# Altium PCB ethernet_version2.PcbDoc
Units mm, origin at the board's own origin, x right, y up, seen from the top; angles counter-clockwise.
Board outline 85 x 56.1 mm, 2 copper layers (Top Layer, Bottom Layer), stack 1.67 mm thick; 36 components, 56 nets, 241 pads, 200 vias.
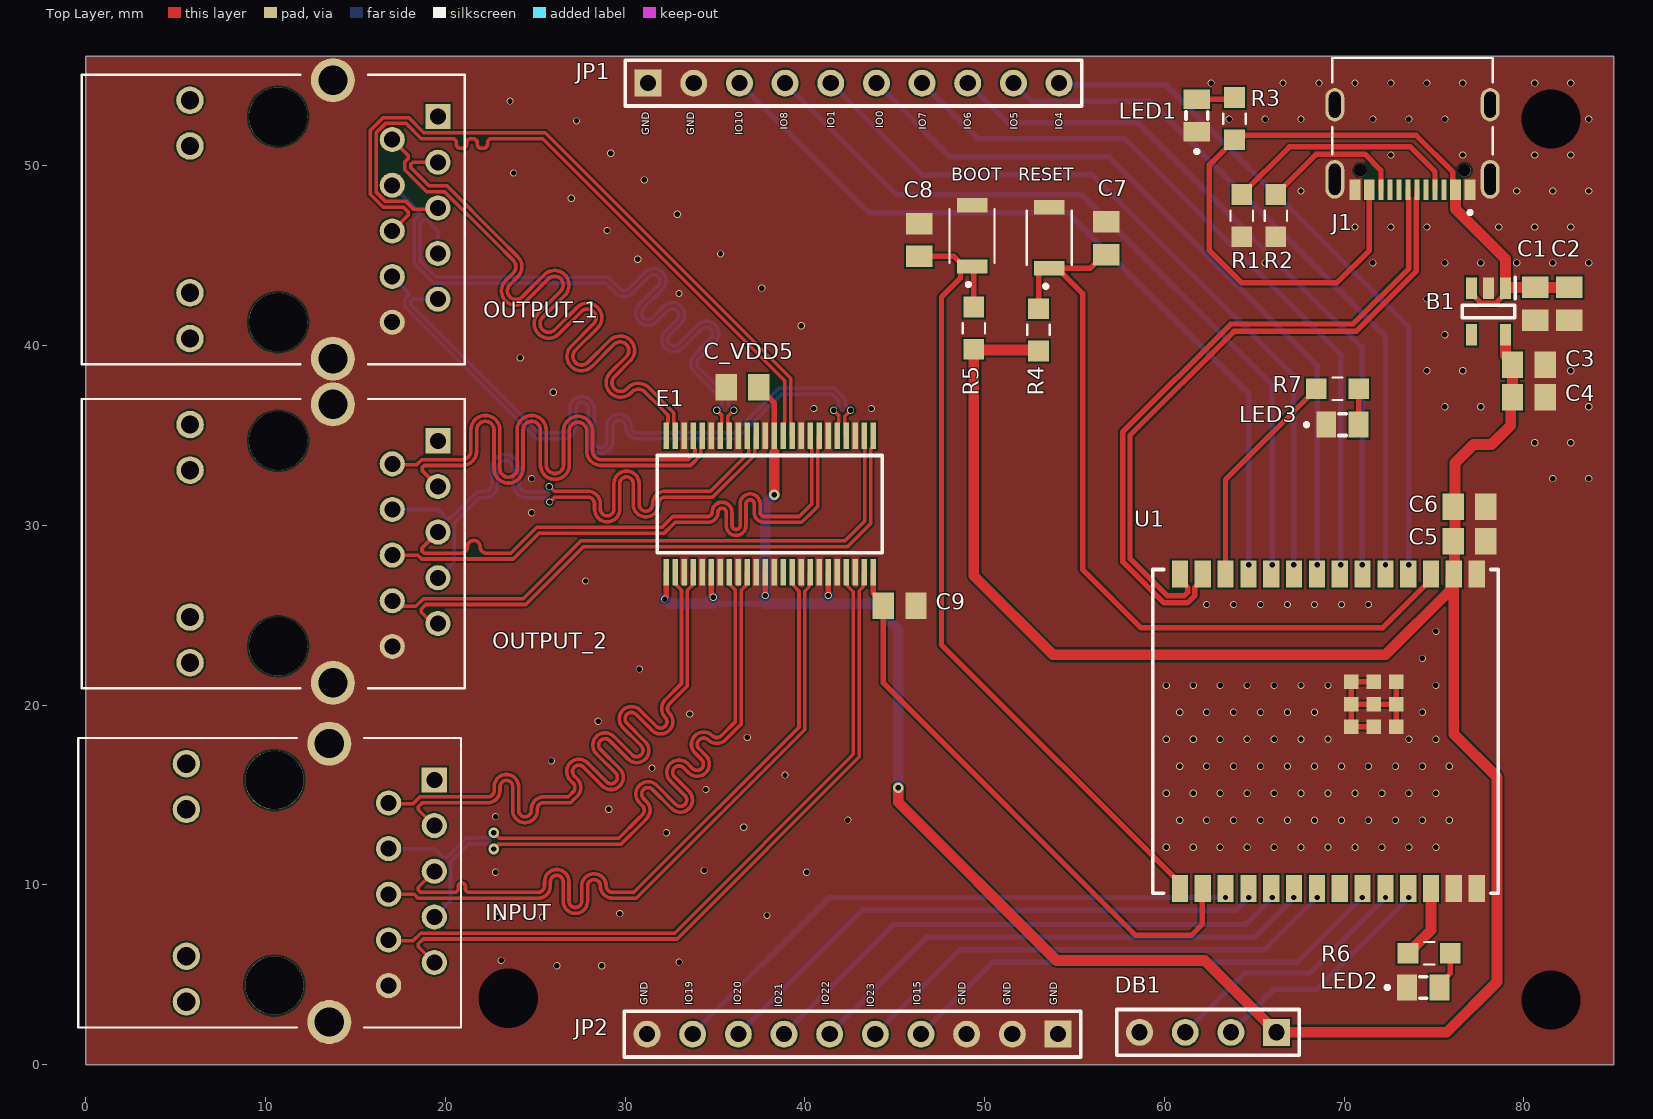
[diagram p0: Top Layer view]
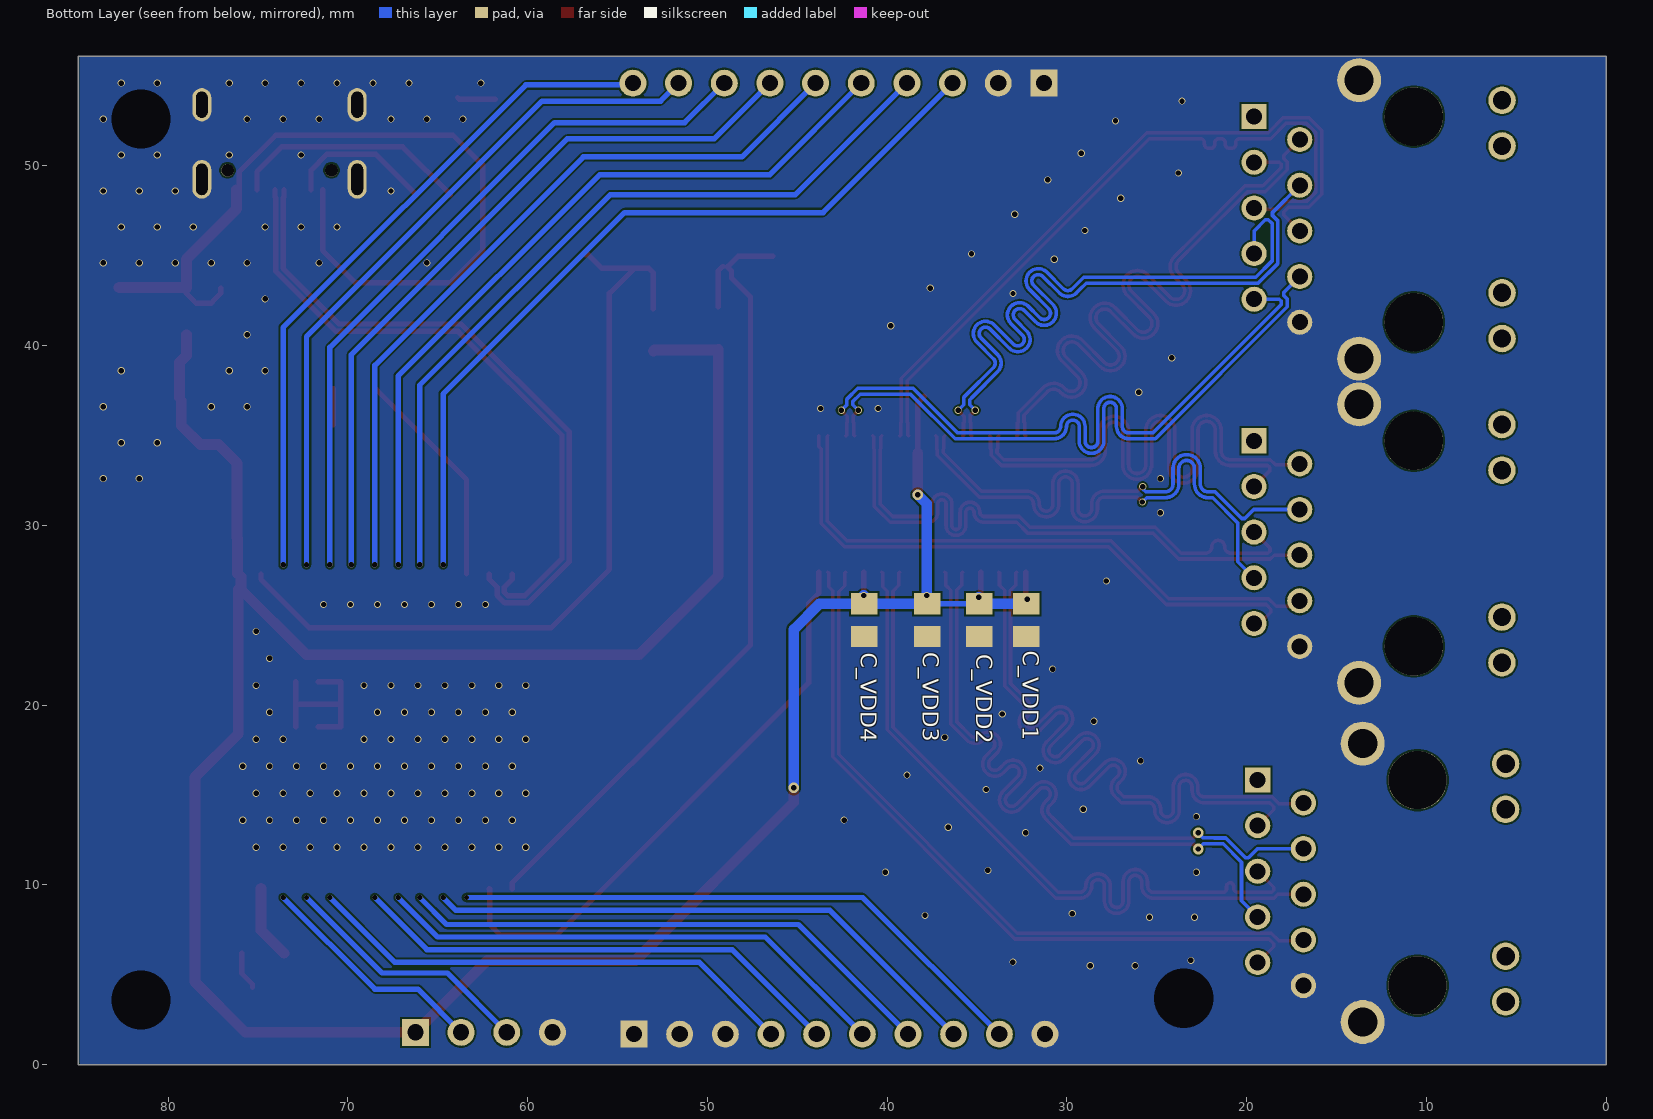
[diagram p1: Bottom Layer view, seen from below]
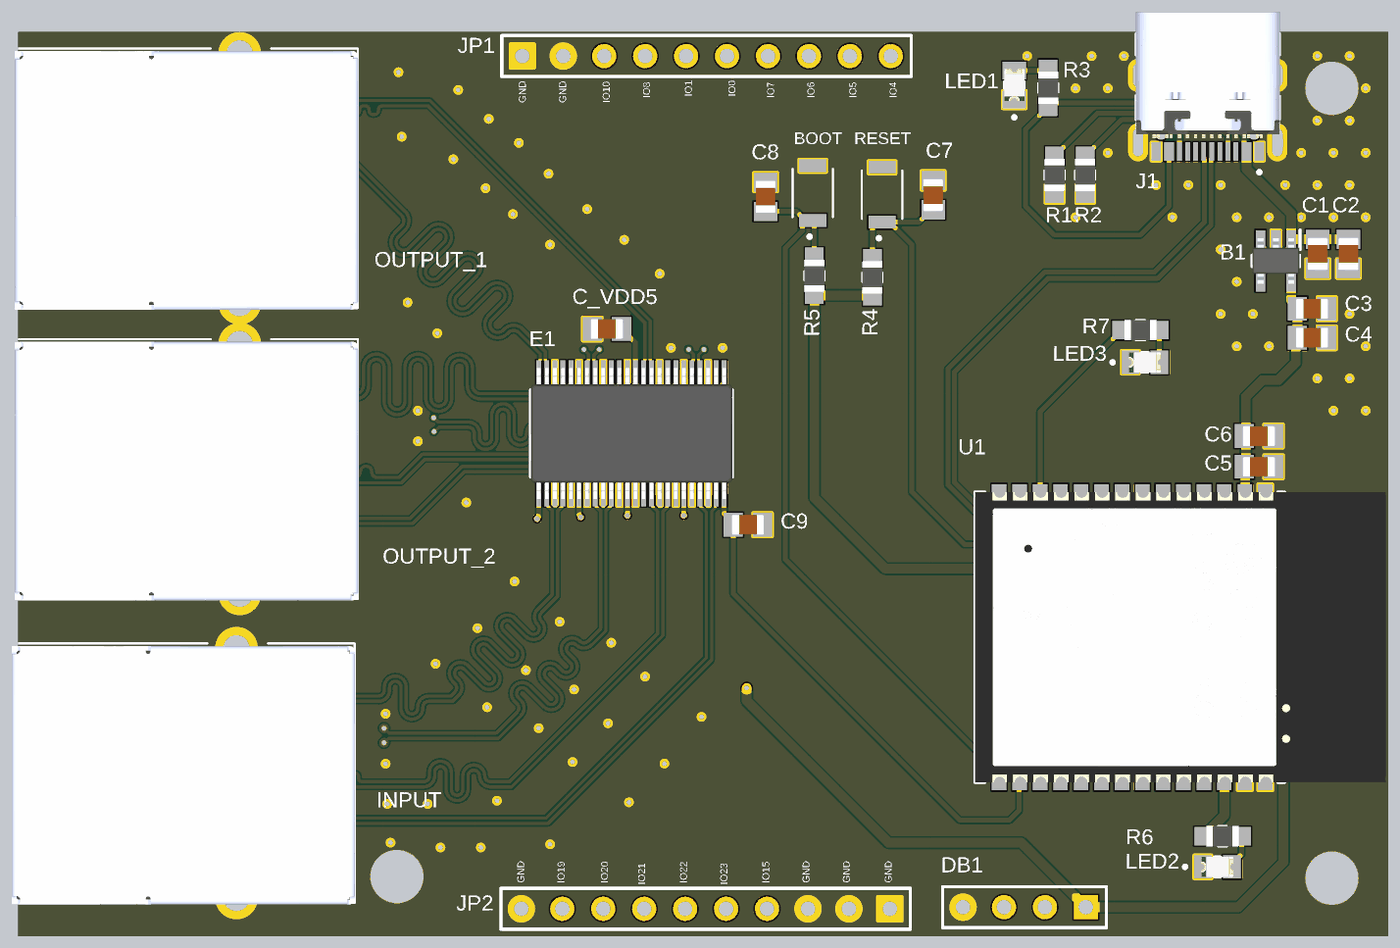
[diagram p2: 3D render of the assembled board from above, using the file's embedded part models]
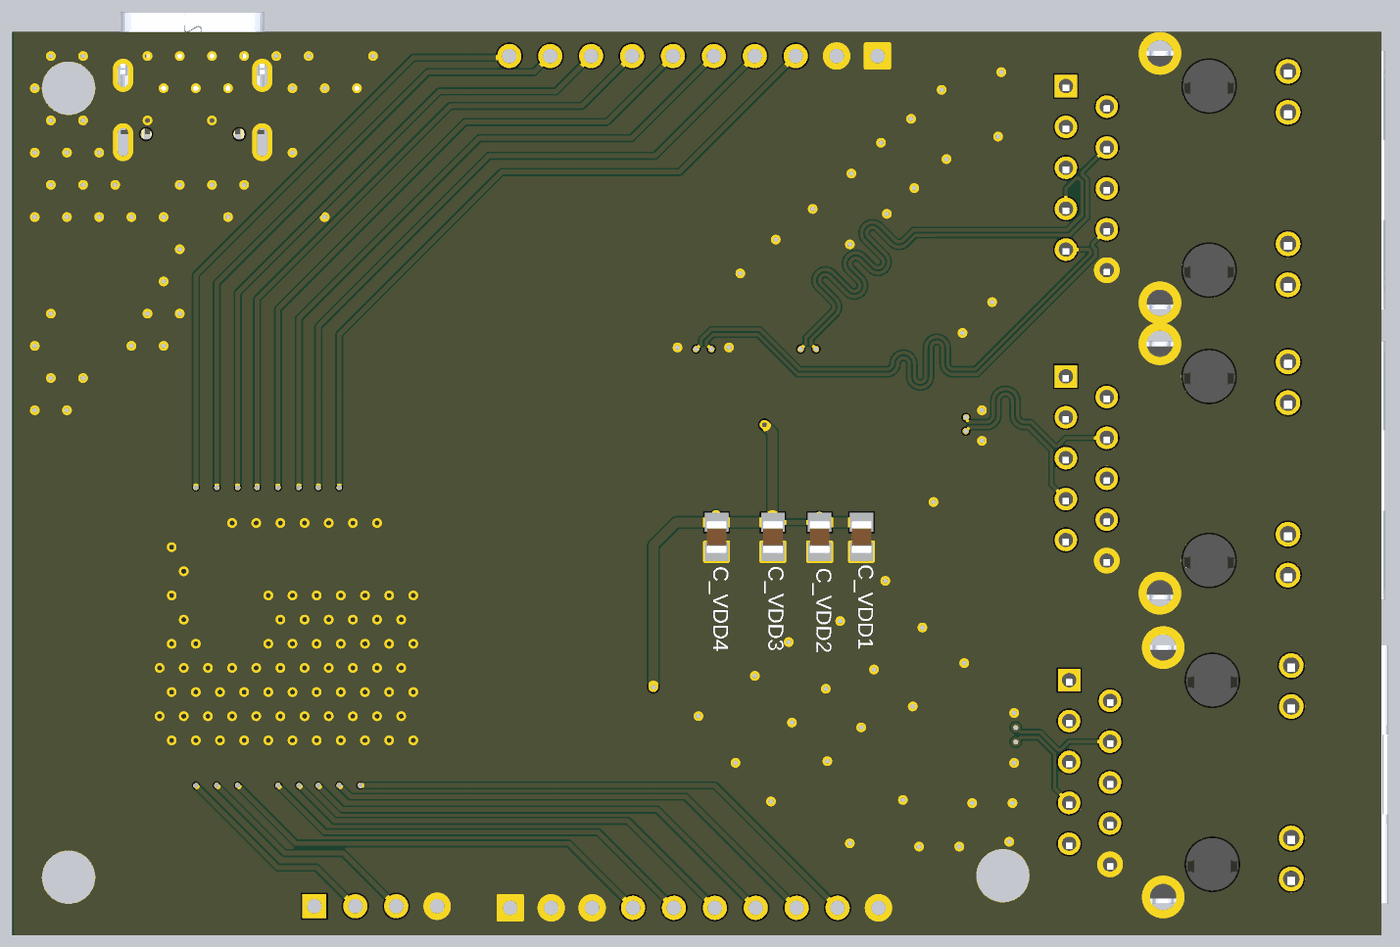
[diagram p3: 3D render of the assembled board from below, using the file's embedded part models]

## Layer stack, top to bottom
Top Solder: solder mask 0.0102, Solder Resist, Dk 3.5
Top Layer: signal copper 0.035
Dielectric 1: dielectric 1.6, FR-4, Dk 4.8
Bottom Layer: signal copper 0.035
Bottom Solder: solder mask 0.0102, Solder Resist, Dk 3.5

## Board outline
0,0 85,0 85,56.1 0,56.1

## Design rules (kind name [scope] priority, off if disabled: settings)
Clearance [All] p1: gap=0.1 ignorepadtopadclearanceinfootprint=TRUE
DiffPairsRouting DiffPairsRouting_1 [InDifferentialPair('DATA')] p1: maxlimit=0.105 minlimit=0.105 mostfreqgap=0.105 toplayer_minwidth=0.3 toplayer_maxwidth=0.3 toplayer_prefwidth=0.3 bottomlayer_minwidth=0.3 bottomlayer_maxwidth=0.3 bottomlayer_prefwidth=0.3 impedanceprofiledriven=TRUE impedanceprofileid={36DEABF2-9603-484D-B744-6E050964AEA9} impedanceprofilevalue=90.000000 maxuncoupledlength=12.7
DiffPairsRouting [All] p2: maxlimit=0.127 minlimit=0.127 mostfreqgap=0.109 toplayer_minwidth=0.2 toplayer_maxwidth=0.2 toplayer_prefwidth=0.2 bottomlayer_minwidth=0.2 bottomlayer_maxwidth=0.2 bottomlayer_prefwidth=0.2 impedanceprofiledriven=TRUE impedanceprofileid={5D736A3D-C63A-46F9-852F-4BBF38D70B52} impedanceprofilevalue=100.000000 maxuncoupledlength=12.7
HoleSize [All] p1: absolutevalues=TRUE maxlimit=10 minlimit=0.025 maxpercent=80.000 minpercent=20.000
HoleToHoleClearance [All] p1: gap=0.1 allowstackedmicrovias=TRUE
MatchedLengths [All] p1: tolerance=25.4 checknetsindiffpair=TRUE checkdiffpairvsdiffpair=FALSE checkxsignals=FALSE checkothers=FALSE usedelayunits=TRUE delaytolerance=50.000000
MinimumSolderMaskSliver [All] p1: minsoldermaskwidth=0.05
PolygonConnect [All] p1: connectstyle=Direct reliefconductorwidth=0.254 reliefentries=4 polygonreliefangle="90 Angle" airgapwidth=0.254
ReturnPath [All] p1: impedanceprofileid={5D736A3D-C63A-46F9-852F-4BBF38D70B52} _gaplimit=0 _useantipads=TRUE
RoutingVias [All] p1: holewidth=0.3 width=0.5 viastyle="Through Hole" minholewidth=0.2 minwidth=0.3 maxholewidth=5 maxwidth=6
SilkToSilkClearance [All] p1: silktosilkclearance=0.1
SilkToSolderMaskClearance [IsPad] p1: minsilkscreentomaskgap=0.05 clearancetoexposedcopper=TRUE
SolderMaskExpansion [All] p1: expansion=0.102 istentingtop=FALSE
Width Supply [(InNet('3.3V') AND InNet('V_BUS'))] p1: maxlimit=0.6 minlimit=0.3 preferedwidth=0.6 minimp=50.000000 maximp=50.000000 favimp=50.000000
Width [All] p2: maxlimit=0.6 minlimit=0.2 preferedwidth=0.3 minimp=50.000000 maximp=50.000000 favimp=50.000000
24 further rules are at their usual default settings.

## Classes and differential pairs
differential pair class Output_2: Output2_1 Output2_2 Output2_3 Output2_4
differential pair class Output_1: Output1_1 Output1_2 Output1_3 Output1_4
differential pair class Input: InputPair1 InputPair2 InputPair3 InputPair4
differential pair Output2_4: +Output2_4_P -Output2_4_N
differential pair Output2_3: +Output2_3_P -Output2_3_N
differential pair Output2_2: +Output2_2_P -Output2_2_N
differential pair Output2_1: +Output2_1_P -Output2_1_N
differential pair Output1_4: +Output1_4_P -Output1_4_N
differential pair Output1_3: +Output1_3_P -Output1_3_N
differential pair Output1_2: +Output1_2_P -Output1_2_N
differential pair Output1_1: +Output1_1_P -Output1_1_N
differential pair InputPair4: +InputPair4_P -InputPair4_N
differential pair InputPair3: +InputPair3_P -InputPair3_N
differential pair InputPair2: +InputPair2_P -InputPair2_N
differential pair InputPair1: +InputPair1_P -InputPair1_N
differential pair DATA: +DATA_P -DATA_N

## Components (designator, comment, footprint, x,y, rotation, side; value= is the part's Value field where it differs from the comment)
B1 "ME6211C33M5G" SOT95P282X145-5N 77.9,41.9 r270 top
BOOT "SW_B3U_P1000" PCBComponent_1 49.3,46.1 r90 top
C1 "10uF" "CAP 0.1UF_0805" 80.5,42.2 r90 top
C2 "0.1uF" "CAP 0.1UF_0805" 82.4,42.2 r90 top
C3 "0.1uF" "CAP 0.1UF_0805" 80.4,38.8 r180 top
C4 "10uF" "CAP 0.1UF_0805" 80.4,37 r180 top
C5 "22uF" "CAP 0.1UF_0805" 77.1,29 r180 top
C6 "0.1uF" "CAP 0.1UF_0805" 77.1,30.9 r180 top
C7 "100nF" "CAP 0.1UF_0805" 56.9,46.1 r270 top
C8 "100nF" "CAP 0.1UF_0805" 46.5,46 r270 top
C9 "100nF" "CAP 0.1UF_0805" 45.4,25.4 r180 top
C_VDD1 "100nF" "CAP 0.1UF_0805" 32.4,24.6 r90 bottom
C_VDD2 "100nF" "CAP 0.1UF_0805" 35,24.6 r90 bottom
C_VDD3 "100nF" "CAP 0.1UF_0805" 37.9,24.6 r90 bottom
C_VDD4 "100nF" "CAP 0.1UF_0805" 41.4,24.6 r90 bottom
C_VDD5 "100nF" "CAP 0.1UF_0805" 36.4,37.8 r0 top
DB1 "*Header" HDR1X4 66.24,1.8 r180 top
E1 "TS3L301" TS3L301 37.542,30.553 r90 top
INPUT "HR911130A" HR911130_A 9.1,10.5 r90 top
J1 "USB_TYPE_C" KINGHELM_KH-TYPE-C-16P 73.8,53.4 r180 top
JP1 "*Header" HDR1X10 31.28,54.6 r0 top
JP2 "*Header" HDR1X10 54.08,1.7 r180 top
LED1 "LED_0805" "LED 0805" 61.8,52.8 r90 top
LED2 "LED_0805" "LED 0805" 74.4,4.3 r0 top
LED3 "LED_0805" "LED 0805" 69.9,35.6 r0 top
OUTPUT_1 "HR911130A" HR911130_A 9.3,47.4 r90 top
OUTPUT_2 "HR911130A" HR911130_A 9.303,29.366 r90 top
R1 "5.1K" RES_10K_0805 64.3,47.1 r270 top
R2 "5.1K" RES_10K_0805 66.2,47.1 r270 top
R3 "220 Ohm" RES_10K_0805 63.9,52.5 r270 top
R4 "10K" RES_10K_0805 53,41 r90 top
R5 "10K" RES_10K_0805 49.4,41.1 r90 top
R6 "220 Ohm" RES_10K_0805 74.598,6.2 r180 top
R7 "220 Ohm" RES_10K_0805 69.5,37.6 r180 top
RESET "SW_B3U_P1000" PCBComponent_1 53.6,46 r90 top
U1 "ESP32_C6_WROOM_N4" ESP32_C6_WROOM_N4 68.861,42.675 r270 top

## Footprints (in the part's own frame and the unit in brackets; to place one, negate y for a bottom-side part, rotate by r counter-clockwise, add the part's x,y. Pads: shape width x height; smd on the part's side, far side on the other; paste and mask are expansions set on the pad)
"CAP 0.1UF_0805" [mm]
  rect 1.19x1.47 smd: 1(-0.783,-0.127) 2(1.037,-0.127)
  body extent -0.87,-0.75 1.13,0.5, height 1.45
ESP32_C6_WROOM_N4 [mm]
  rect 1.5x0.9 smd: 1(15.38,8.509) 2(15.38,7.239) 3(15.38,5.969) 4(15.38,4.699) 5(15.38,3.429) 6(15.38,2.159) 7(15.38,0.889) 8(15.38,-0.381) 9(15.38,-1.651) 10(15.38,-2.921) 11(15.38,-4.191) 12(15.38,-5.461) 13(15.38,-6.731) 14(15.38,-8.001) 15(32.88,-8.001) 16(32.88,-6.731) 17(32.88,-5.461) 18(32.88,-4.191) 19(32.88,-2.921) 20(32.88,-1.651) 21(32.88,-0.381) 22(32.88,0.889) 23(32.88,2.159) 24(32.88,3.429) 25(32.88,4.699) 26(32.88,5.969) 27(32.88,7.239) 28(32.88,8.509)
  rect 0.8x0.8 smd: 29(22.625,2.789) 30(21.375,4.039) 31(21.375,2.789) 32(21.375,1.539) 33(22.625,1.539) 34(23.875,1.539) 35(23.875,2.789) 36(23.875,4.039) 37(22.625,4.039)
  silkscreen extent 15.13,-9.5 33.13,9.7, body extent 15.12,-9.5 33.14,16, height 3.11
HDR1X4 [mm] "Connector; Header; 4 Position"
  rect 1.5x1.5 hole 0.9: 1(0,0)
  round 1.5 hole 0.9: 2(2.54,0) 3(5.08,0) 4(7.62,0)
  silkscreen extent -1.27,-1.27 8.89,1.27, body extent -1.27,-1.27 8.89,1.27, height 7
HDR1X10 [mm] "Connector; Header; 10 Position"
  rect 1.5x1.5 hole 0.9: 1(0,0)
  round 1.5 hole 0.9: 2(2.54,0) 3(5.08,0) 4(7.62,0) 5(10.16,0) 6(12.7,0) 7(15.24,0) 8(17.78,0) 9(20.32,0) 10(22.86,0)
  silkscreen extent -1.27,-1.27 24.13,1.27, body extent -1.27,-1.27 24.13,1.27, height 7
HR911130_A [mm]
  rect 1.398x1.398 / inner round 1.398 / far side rect 1.398x1.398 hole 0.89: 1(5.339,-10.287)
  round 1.398 hole 0.89: 2(4.059,-7.747) 3(2.799,-10.287) 4(1.519,-7.747) 5(0.259,-10.287) 6(-1.021,-7.747) 7(-2.281,-10.287) 8(-3.561,-7.747) 9(-4.821,-10.287) 10(-6.101,-7.747)
  round 1.53 hole 1.02: 11(6.244,3.503) 12(3.704,3.503) 13(-4.466,3.503) 14(-7.006,3.503)
  round 2.445 hole 1.63: S1(7.364,-4.447) S2(-8.126,-4.447)
  round 3.25 hole 3.25 unplated: ""(-6.096,-1.397) ""(5.334,-1.397)
  silkscreen extent -8.43,-11.78 7.67,9.52, body extent -8.53,-11.8 7.51,9.5, height 13.5
KINGHELM_KH-TYPE-C-16P [mm]
  rect 0.6x1.15 smd: A1_B12(-3.2,4.725) A4_B9(-2.4,4.725) A9_B4(2.4,4.725) A12_B1(3.2,4.725)
  rect 0.3x1.15 smd: A5(-1.25,4.725) A6(-0.25,4.725) A7(0.25,4.725) A8(1.25,4.725) B5(1.75,4.725) B6(0.75,4.725) B7(-0.75,4.725) B8(-1.75,4.725)
  oval 1.05x1.85 hole 0.65 slot 1.45 at 90 deg: SH1(-4.32,0) SH2(4.32,0)
  oval 1.05x2.15 hole 0.65 slot 1.75 at 90 deg: SH3(-4.32,4.15) SH4(4.32,4.15)
  round 0.7 hole 0.7 unplated: ""(-2.89,3.65) ""(2.89,3.65)
  silkscreen extent -4.47,-2.6 4.47,6.1, body extent -4.47,-3.91 4.47,3.91, height 3.41
"LED 0805" [mm]
  rect 1.1x1.45 smd: A(0.9,0) C(-0.9,0)
  silkscreen extent -2.1,-0.6 0.2,0.6, body extent -1,-0.63 1,0.63, height 0.7
PCBComponent_1 [mm]
  rect 0.8x1.7 smd: 1(-1.7,0) 2(1.7,0)
  silkscreen extent -2.8,-1.25 1.5,1.25
RES_10K_0805 [mm]
  rect 1.15x1.15 smd: 1(-1.302,0) 2(1.048,0)
  silkscreen extent -0.41,-0.63 0.15,0.63, body extent -1.13,-0.63 0.87,0.63, height 0.7
SOT95P282X145-5N [mm]
  rect 1.2x0.6 smd: 1(-1.3,1.077) 2(-1.3,0.127) 3(-1.3,-0.823) 4(1.3,-0.823) 5(1.3,1.077)
  silkscreen extent -1.9,-1.34 0.35,1.63, body extent -1.41,-1.34 1.41,1.59, height 1.45
TS3L301 [mm]
  rect 1.475x0.3 smd: 1(-3.153,5.242) 2(-3.153,4.742) 3(-3.153,4.242) 4(-3.153,3.742) 5(-3.153,3.242) 6(-3.153,2.742) 7(-3.153,2.242) 8(-3.153,1.742) 9(-3.153,1.242) 10(-3.153,0.742) 11(-3.153,0.242) 12(-3.153,-0.258) 13(-3.153,-0.758) 14(-3.153,-1.258) 15(-3.153,-1.758) 16(-3.153,-2.258) 17(-3.153,-2.758) 18(-3.153,-3.258) 19(-3.153,-3.758) 20(-3.153,-4.258) 21(-3.153,-4.758) 22(-3.153,-5.258) 23(-3.153,-5.758) 24(-3.153,-6.258) 25(4.423,-6.258) 26(4.423,-5.758) 27(4.423,-5.258) 28(4.423,-4.758) 29(4.423,-4.258) 30(4.423,-3.758) 31(4.423,-3.258) 32(4.423,-2.758) 33(4.423,-2.258) 34(4.423,-1.758) 35(4.423,-1.258) 36(4.423,-0.758) 37(4.423,-0.258) 38(4.423,0.242) 39(4.423,0.742) 40(4.423,1.242) 41(4.423,1.742) 42(4.423,2.242) 43(4.423,2.742) 44(4.423,3.242) 45(4.423,3.742) 46(4.423,4.242) 47(4.423,4.742) 48(4.423,5.242)
  silkscreen extent -2.06,-6.76 3.33,5.74, body extent -3.43,-6.76 4.7,5.74, height 1.1

## Part data
B1: "High Speed LDO Regulators, High PSRR, Low noise, ME6211 Series", Manufacturer_Name=Microne, Geometry.Height=1.45mm, Manufacturer_Part_Number=ME6211C33M5G
C1 C2 C3 C4 C5 C6 C7 C8 C9 C_VDD1 C_VDD2 C_VDD3 C_VDD4 C_VDD5: library part CAP_0.1uF_0805
DB1: library part "Header 4", "Header, 4-Pin, Right Angle", LatestRevisionDate=17-Jul-2002, LatestRevisionNote="Re-released for DXP Platform.", Publisher="Altium Limited"
J1: library part KH-TYPE-C-16P, Package=None, Check_prices=https://www.snapeda.com/parts/KH-TYPE-C-16P/Kinghelm/view-part/?ref=eda, MF=kinghelm, MP=KH-TYPE-C-16P, SnapEDA_Link=https://www.snapeda.com/parts/KH-TYPE-C-16P/Kinghelm/view-part/?ref=snap
JP1 JP2: library part "Header 10", "Header, 10-Pin, Right Angle"
R1 R2 R3 R4 R5 R6 R7: library part RES_10K_0805

## Free pads (board coordinates)
  round 1.524 hole 3.3: 4(23.5,3.7) 4(81.5,3.6) 4(81.5,52.6)

## Via types
v1: diameter 0.4, hole 0.3, Top Layer to Bottom Layer, 174 vias
v2: diameter 0.3, hole 0.3, Top Layer to Bottom Layer, 16 vias
v3: diameter 0.4, hole 0.3, Top Layer to Bottom Layer, tented top, 6 vias
v4: diameter 0.6, hole 0.3, Top Layer to Bottom Layer, tented top, 2 vias
v5: diameter 0.6, hole 0.3, Top Layer to Bottom Layer, 2 vias

## Nets (pads, with @x,y where several pads share a name; then routed paths per layer and width w, separated by ;. In a path a pad name is that pad's centre, name@x,y a point inside that pad or via, vN(x,y) a via of type N, cw(c..) or ccw(c..) an arc to the next point about the centre after c; other vN are vias at no path point)
3.3V: B1.5 C3.2 C4.2 C5.2 C6.2 C_VDD1.2 C_VDD2.2 C_VDD3.2 C_VDD4.2 C_VDD5.2 DB1.1 E1.1 E1.6 E1.12 E1.19 E1.36 R4.1 R5.1 U1.2 | length 166.5
  Top Layer w0.3: v1(32.2,25.9) 32.2,25.927 32.3,26.027 E1.1 ; E1.6 34.8,26.127 34.9,26.027 v1(34.9,26) ; v1(37.8,26.1) E1.12 ; C_VDD5.2@37.937,37.173 38.3,36.81 E1.36 38.3,34.023 ; v1(41.3,26.1) E1.19
  Top Layer w0.6: v5(38.3,31.7) 38.3,34.023 ; v5(45.2,15.4) 45.2,14.6 54,5.8 62.24,5.8 DB1.1 75.7,1.8 78.5,4.6 78.5,16 76.1,18.4 76.1,26.45 ; R4.1 52.95,39.748 49.45,39.748 R5.1 49.4,27.2 53.8,22.8 72.3,22.8 75.95,26.45 75.95,27.145 U1.2 76.131,27.326 76.131,29.295 76.163,29.327 76.163,31.327 76.163,33.463 77.2,34.5 78.2,34.5 79.263,35.563 C4.2@79.263,36.927 ; B1.5 78.977,39.453 79.363,39.067 C3.2 C4.2
  Bottom Layer w0.3: v1(34.9,26) 35.263,25.637 C_VDD3.2
  Bottom Layer w0.6: v1(32.2,25.9) 32.463,25.637 34.537,25.637 C_VDD2.2@34.705,25.805 ; C_VDD2.2 34.9,25.664 v1(34.9,26) ; v5(38.3,31.7) 37.8,31.2 v1(37.8,26.1) 37.8,25.664 C_VDD3.2 C_VDD4.2 ; v1(41.3,26.1) 41.3,25.664 C_VDD4.2 ; v5(45.2,15.4) 45.2,24.2 43.763,25.637 C_VDD4.2
BOOT: BOOT.1 C8.2 R5.2 U1.15 | length 45.8
  Top Layer w0.3: C8.2 48.287,44.963 BOOT.1@48.85,44.4 ; BOOT.1@48.907,44.4 48.657,44.15 48.657,43.757 47.6,42.7 47.6,23.355 60.86,10.095 U1.15 ; BOOT.1@49.103,44.4 49.15,44.4 49.4,44.15 R5.2
DATA_N: J1.A7 U1.13 | length 37.8
  Top Layer w0.3: U1.13 62.13,26.995 61.697,26.562 61.697,26.103 61.285,25.69 59.978,25.69 57.681,27.986 57.681,35.181 63.7,41.2 70.5,41.2 73.598,44.298 73.598,48.202 73.55,48.25 J1.A7
DATA_P: J1.A6 U1.14 | length 36.5
  Top Layer w0.3: U1.14 60.86,26.995 61.293,26.562 61.293,26.271 61.117,26.095 60.145,26.095 58.086,28.154 58.086,35.014 63.868,40.795 70.668,40.795 74.002,44.13 74.002,48.202 74.05,48.25 J1.A6
GND: B1.2 BOOT.2 C1.1 C2.1 C3.1 C4.1 C5.1 C6.1 C7.1 C8.1 C9.1 C_VDD1.1 C_VDD2.1 C_VDD3.1 C_VDD4.1 C_VDD5.1 DB1.4 E1.3 E1.5 E1.7 E1.9 E1.11 E1.13 E1.16 E1.18 E1.20 E1.22 E1.27 E1.30 E1.33 E1.37 E1.40 E1.43 E1.46 INPUT.10 INPUT.S1 INPUT.S2 J1.A1_B12 J1.A12_B1 J1.SH1 J1.SH2 J1.SH3 J1.SH4 JP1.1 JP1.2 JP2.1 JP2.2 JP2.3 JP2.10 LED1.C LED2.C LED3.C OUTPUT_1.10 OUTPUT_1.S1 OUTPUT_1.S2 OUTPUT_2.10 OUTPUT_2.S1 OUTPUT_2.S2 pad.4 R1.2 R2.2 RESET.2 U1.1 U1.27 U1.28 U1.29 U1.30 U1.31 U1.32 U1.33 U1.34 U1.35 U1.36 U1.37 | length 10
  Top Layer w0.3: U1.35 U1.34 U1.33 ; U1.31 U1.32 U1.33 ; U1.36 U1.37 ; U1.30 U1.37 ; U1.33 U1.29 U1.37
  other v1: 26.206,5.504 28.706,5.504 33.006,5.704 23.106,5.804 22.906,8.204 25.406,8.204 37.896,8.306 29.706,8.404 22.8,10.7 40.096,10.706 34.396,10.806 60.1,12.1 61.6,12.1 63.1,12.1 64.6,12.1 66.1,12.1 67.6,12.1 69.1,12.1 70.6,12.1 72.1,12.1 73.6,12.1 75.1,12.1 32.296,12.906 36.596,13.206 60.85,13.6 62.35,13.6 63.85,13.6 65.35,13.6 66.85,13.6 68.35,13.6 69.85,13.6 71.35,13.6 72.85,13.6 74.35,13.6 75.85,13.6 42.396,13.606 22.8,13.8 29.096,14.206 60.1,15.1 61.6,15.1 63.1,15.1 64.6,15.1 66.1,15.1 67.6,15.1 69.1,15.1 70.6,15.1 72.1,15.1 73.6,15.1 75.1,15.1 34.496,15.306 38.896,16.106 31.5,16.5 60.85,16.6 62.35,16.6 63.85,16.6 65.35,16.6 66.85,16.6 68.35,16.6 69.85,16.6 71.35,16.6 72.85,16.6 74.35,16.6 75.85,16.6 25.9,16.9 60.1,18.1 61.6,18.1 63.1,18.1 64.6,18.1 66.1,18.1 67.6,18.1 69.1,18.1 73.6,18.1 75.1,18.1 36.796,18.206 28.496,19.106 33.596,19.506 60.85,19.6 62.35,19.6 63.85,19.6 65.35,19.6 66.85,19.6 68.35,19.6 74.35,19.6 60.1,21.1 61.6,21.1 63.1,21.1 64.6,21.1 66.1,21.1 67.6,21.1 69.1,21.1 75.1,21.1 30.796,22.006 74.35,22.6 75.1,24.1 62.35,25.6 63.85,25.6 65.35,25.6 66.85,25.6 68.35,25.6 69.85,25.6 71.35,25.6 27.806,26.904 24.8,30.7 24.8,32.6 81.6,32.6 83.6,32.6 80.6,34.6 82.6,34.6 40.5,36.5 43.7,36.5 75.6,36.6 77.6,36.6 83.6,36.6 26.006,37.404 74.6,38.6 76.6,38.6 82.6,38.6 24.166,39.316 75.6,40.6 39.8,41.1 74.6,42.6 33,42.9 37.6,43.2 65.6,44.6 71.6,44.6 75.6,44.6 77.6,44.6 79.6,44.6 81.6,44.6 83.6,44.6 30.7,44.8 35.306,45.104 29,46.4 70.6,46.6 72.6,46.6 74.6,46.6 78.6,46.6 80.6,46.6 82.6,46.6 32.906,47.304 27,48.2 67.6,48.6 79.6,48.6 81.6,48.6 83.6,48.6 31.066,49.216 23.8,49.6 72.6,50.6 76.6,50.6 80.6,50.6 82.6,50.6 29.2,50.7 27.3,52.5 63.6,52.6 65.6,52.6 67.6,52.6 71.6,52.6 73.6,52.6 75.6,52.6 83.6,52.6 23.6,53.6 62.6,54.6 66.6,54.6 68.6,54.6 70.6,54.6 72.6,54.6 74.6,54.6 76.6,54.6 80.6,54.6 82.6,54.6
GPIO0: JP1.6 U1.8 | length 42.1
  Bottom Layer w0.3: JP1.6 48.08,50.5 56.9,50.5 68.5,38.9 v2(68.5,27.8)
GPIO1: JP1.5 U1.9 | length 43
  Bottom Layer w0.3: JP1.5 46.54,49.5 56,49.5 67.2,38.3 v2(67.2,27.8)
GPIO3: R6.2 U1.26 | length 4.1
  Top Layer w0.6: R6.2 74.83,7.48 U1.26
GPIO4: JP1.10 U1.4 | length 38.3
  Bottom Layer w0.3: JP1.10 54.24,54.5 60.1,54.5 73.6,41 v2(73.6,27.8)
GPIO5: JP1.9 U1.5 | length 39.2
  Bottom Layer w0.3: JP1.9 52.6,53.6 59.2,53.6 72.3,40.5 v2(72.3,27.8)
GPIO6: JP1.8 U1.6 | length 40.1
  Bottom Layer w0.3: JP1.8 51.26,52.4 58.5,52.4 71,39.9 v2(71,27.8)
GPIO7: JP1.7 U1.7 | length 41.2
  Bottom Layer w0.3: JP1.7 49.62,51.5 57.8,51.5 69.8,39.5 v2(69.8,27.8)
GPIO8: JP1.4 U1.10 | length 44.1
  Bottom Layer w0.3: JP1.4 45.1,48.4 55.4,48.4 66,37.8 v2(66,27.8)
GPIO10: JP1.3 U1.11 | length 45
  Bottom Layer w0.3: JP1.3 43.56,47.4 54.6,47.4 64.7,37.3 v2(64.7,27.8)
GPIO11: R7.2 U1.12 | length 12.4
  Top Layer w0.3: U1.12 63.4,32.548 R7.2
GPIO15: JP2.4 U1.23 | length 27.7
  Bottom Layer w0.3: JP2.4 50.46,5.7 67.4,5.7 v2(71,9.3)
GPIO19: JP2.9 U1.17 | length 32.8
  Bottom Layer w0.3: JP2.9 41.36,9.3 v2(63.4,9.3)
GPIO20: JP2.8 U1.18 | length 31.5
  Bottom Layer w0.3: JP2.8 43.2,8.6 64,8.6 v2(64.7,9.3)
GPIO21: JP2.7 U1.19 | length 30.3
  Bottom Layer w0.3: JP2.7 44.94,7.8 64.5,7.8 v2(66,9.3)
GPIO22: JP2.6 U1.20 | length 29
  Bottom Layer w0.3: JP2.6 46.78,7.1 65,7.1 v2(67.2,9.3)
GPIO23: JP2.5 U1.21 | length 27.7
  Bottom Layer w0.3: JP2.5 48.62,6.4 65.6,6.4 v2(68.5,9.3)
InputPair1_N: E1.4 INPUT.3 | length 40.5
  Top Layer w0.2: INPUT.3 18.503,14.183 18.503,14.349 18.726,14.572 22.1,14.572 22.364,14.572 ccw(c22.364,15.253) 23.045,15.253 23.045,15.461 cw(c23.399,15.461) 23.753,15.461 23.753,14.138 ccw(c24.434,14.138) 25.115,14.138 25.115,14.218 cw(c25.469,14.218) 25.469,14.572 26.3,14.572 26.972,14.572 27.15,14.75 27.336,14.936 ccw(c26.855,15.418) 27.336,15.899 27.178,16.058 cw(c27.428,16.309) 27.178,16.559 cw(c27.428,16.309) 27.678,16.559 28.735,15.502 ccw(c29.217,15.984) 29.697,15.501 29.698,15.502 ccw(c29.217,15.984) 29.698,16.465 28.634,17.529 cw(c28.884,17.78) 28.634,18.03 cw(c28.884,17.78) 29.134,18.03 30.163,17.001 ccw(c30.645,17.483) 31.125,17 31.126,17.001 ccw(c30.645,17.483) 31.126,17.964 30.101,18.989 cw(c30.352,19.239) 30.101,19.49 cw(c30.352,19.239) 30.602,19.49 31.496,18.596 ccw(c31.978,19.077) 32.458,18.594 32.459,18.596 ccw(c31.978,19.077) 32.459,19.559 cw(c32.71,19.809) 32.459,20.059 33.463,21.064 33.463,21.636 33.463,26.386 33.75,26.672 33.75,27.35 E1.4
InputPair1_P: E1.2 INPUT.2 | length 40.3
  Top Layer w0.2: INPUT.2 16.89,14.516 18.208,14.516 18.59,14.899 22.1,14.899 22.364,14.899 ccw(c22.364,15.253) 22.718,15.253 22.718,15.461 cw(c23.399,15.461) 24.08,15.461 24.08,14.138 ccw(c24.434,14.138) 24.788,14.138 24.788,14.218 cw(c25.469,14.218) 25.469,14.899 26.3,14.899 26.836,14.899 26.919,14.981 27.105,15.168 ccw(c26.855,15.418) 27.105,15.668 26.946,15.827 cw(c27.428,16.309) 26.945,16.789 26.946,16.79 cw(c27.428,16.309) 27.909,16.79 28.966,15.733 ccw(c29.217,15.984) 29.467,15.733 ccw(c29.217,15.984) 29.467,16.234 28.403,17.298 cw(c28.884,17.78) 28.401,18.26 28.403,18.261 cw(c28.884,17.78) 29.366,18.261 30.394,17.233 ccw(c30.645,17.483) 30.895,17.233 ccw(c30.645,17.483) 30.895,17.733 29.87,18.758 cw(c30.352,19.239) 29.869,19.72 29.87,19.721 cw(c30.352,19.239) 30.833,19.721 31.727,18.827 ccw(c31.978,19.077) 32.228,18.827 ccw(c31.978,19.077) 32.229,19.327 cw(c32.71,19.809) 32.229,20.292 33.136,21.199 33.136,21.963 33.136,26.393 32.85,26.68 32.85,27.35 E1.2
InputPair2_N: E1.10 INPUT.7 | length 38.9
  Top Layer w0.2: v4(22.7,12) 22.973,12.273 29.786,12.273 31.007,13.493 31.193,13.68 ccw(c30.712,14.161) 31.193,14.643 31.027,14.809 ; 31.027,14.809 cw(c31.277,15.059) 31.027,15.309 cw(c31.277,15.059) 31.528,15.309 32.592,14.245 ccw(c33.073,14.727) 33.554,14.244 33.555,14.245 ccw(c33.073,14.727) 33.555,15.208 32.748,16.015 cw(c32.998,16.265) 32.748,16.516 cw(c32.998,16.265) 33.249,16.516 33.523,16.241 ccw(c34.005,16.723) 34.485,16.24 34.486,16.241 ccw(c34.005,16.723) 34.486,17.204 34.12,17.57 cw(c34.371,17.82) 34.12,18.071 cw(c34.371,17.82) 34.62,18.071 ccw(c35.103,18.552) 35.585,18.072 36.465,18.951 36.465,20.935 36.465,26.394 36.75,26.68 36.75,27.35 E1.10
  Bottom Layer w0.2: INPUT.7 20.286,9.118 20.286,11.269 21.301,12.285 21.927,12.285 21.929,12.286 22.414,12.286 v4(22.7,12)
InputPair2_P: E1.8 INPUT.4 | length 38.7
  Top Layer w0.2: v4(22.7,12.9) 23,12.6 29.651,12.6 30.776,13.724 30.962,13.911 ccw(c30.712,14.161) 30.962,14.411 30.796,14.578 cw(c31.277,15.059) 30.794,15.539 30.796,15.541 cw(c31.277,15.059) 31.759,15.541 32.823,14.476 ccw(c33.073,14.727) 33.324,14.476 ccw(c33.073,14.727) 33.324,14.977 32.517,15.784 cw(c32.998,16.265) 32.516,16.746 32.517,16.747 cw(c32.998,16.265) 33.48,16.747 33.755,16.472 ccw(c34.005,16.723) 34.255,16.472 ccw(c34.005,16.723) 34.255,16.973 33.889,17.339 cw(c34.371,17.82) 33.888,18.301 33.889,18.302 cw(c34.371,17.82) 34.852,18.302 ccw(c35.103,18.552) 35.353,18.302 36.138,19.086 36.138,21.024 36.138,26.392 35.85,26.68 35.85,27.35 E1.8
  Bottom Layer w0.2: INPUT.4 19.398,12.019 19.903,11.514 20.069,11.514 21.166,12.612 21.791,12.612 21.793,12.613 22.413,12.613 v4(22.7,12.9)
InputPair3_N: E1.17 INPUT.6 | length 40.5
  Top Layer w0.2: INPUT.6 18.265,9.479 18.482,9.262 24.9,9.262 25.164,9.262 ccw(c25.164,9.943) 25.845,9.943 25.845,10.178 cw(c26.199,10.178) 26.553,10.178 26.553,9.095 ccw(c27.234,9.095) 27.915,9.095 27.915,9.943 cw(c28.269,9.943) 28.623,9.943 ccw(c29.304,9.943) 29.304,9.262 30.2,9.262 30.625,9.262 40,18.638 40,26.344 40.25,26.594 40.25,27.35 E1.17
InputPair3_P: E1.15 INPUT.5 | length 40.5
  Top Layer w0.2: INPUT.5 18.5,9.872 18.5,9.706 18.617,9.589 19.92,9.589 20.522,9.589 ccw(c20.522,9.789) 20.722,9.789 20.722,9.916 cw(c20.922,9.916) 21.122,9.916 21.122,9.789 ccw(c21.322,9.789) 21.322,9.589 21.822,9.589 24.9,9.589 25.164,9.589 ccw(c25.164,9.943) 25.518,9.943 25.518,10.178 cw(c26.199,10.178) 26.88,10.178 26.88,9.095 ccw(c27.234,9.095) 27.588,9.095 27.588,9.943 cw(c28.269,9.943) 28.95,9.943 ccw(c29.304,9.943) 29.304,9.589 30.2,9.589 30.489,9.589 39.673,18.773 39.673,26.344 39.35,26.667 39.35,27.35 E1.15
InputPair4_N: E1.23 INPUT.9 | length 40.6
  Top Layer w0.2: INPUT.9 18.503,6.563 18.503,6.729 18.767,6.993 32.893,6.993 43.027,17.127 43.027,26.357 43.25,26.58 43.25,27.35 E1.23
InputPair4_P: E1.21 INPUT.8 | length 40.5
  Top Layer w0.2: INPUT.8 16.89,6.896 18.208,6.896 18.632,7.32 32.758,7.32 42.7,17.262 42.7,26.3 42.35,26.65 42.35,27.35 E1.21
NC: U1.22
NetJ1_A5: J1.A5 R1.1 | length 13.4
  Top Layer w0.3: R1.1 66.95,51.052 73.682,51.052 75.05,49.684 J1.A5
NetJ1_B5: J1.B5 R2.1 | length 8.2
  Top Layer w0.3: R2.1 68.45,50.652 71.148,50.652 72.05,49.75 J1.B5
NetLED1_A: LED1.A R3.1 | length 2.1
  Top Layer w0.3: LED1.A 63.798,53.7 R3.1
NetLED2_A: LED2.A R6.1 | length 2.1
  Top Layer w0.3: LED2.A 75.3,4.475 75.9,5.075 R6.1
NetLED3_A: LED3.A R7.1 | length 2
  Top Layer w0.3: LED3.A 70.802,35.602 R7.1
Output1_1_N: E1.47 OUTPUT_1.3 | length 40
  Top Layer w0.2: OUTPUT_1.3 18.183,50.199 18.066,50.082 18.066,49.916 19.097,48.885 20.095,48.885 22.922,46.058 24.019,44.96 cw(c23.448,44.389) 24.019,43.818 23.588,43.387 ccw(c23.928,43.046) 23.588,42.706 ccw(c23.928,43.046) 24.268,42.706 25.506,43.944 cw(c26.078,43.373) 26.649,43.944 cw(c26.078,43.373) 26.649,42.802 ; 26.648,42.801 25.411,41.564 ccw(c25.751,41.224) 25.411,40.883 ccw(c25.751,41.224) 26.091,40.883 27.329,42.122 cw(c27.901,41.55) 28.472,42.122 cw(c27.901,41.55) 28.472,40.979 ; 28.471,40.978 27.234,39.741 ccw(c27.574,39.401) 27.234,39.061 ccw(c27.574,39.401) 27.914,39.06 29.152,40.299 cw(c29.724,39.727) 30.243,40.347 30.247,40.347 30.295,40.299 ; 30.295,40.298 30.343,40.251 30.343,40.246 cw(c29.724,39.727) 30.295,39.156 29.413,38.274 ccw(c29.753,37.934) 29.413,37.594 ccw(c29.753,37.934) 30.093,37.594 30.168,37.669 cw(c30.74,37.097) 31.259,37.717 31.263,37.717 31.311,37.669 ; 31.311,37.669 32.18,36.8 32.714,36.266 32.714,35.731 32.75,35.694 32.75,35.026 E1.47
Output1_1_P: E1.48 OUTPUT_1.2 | length 40.2
  Top Layer w0.2: OUTPUT_1.2 17.931,50.575 17.931,50.409 17.739,50.217 17.739,49.781 18.962,48.558 19.959,48.558 22.69,45.827 23.788,44.729 cw(c23.448,44.389) 23.788,44.049 23.357,43.618 ccw(c23.928,43.046) 23.357,42.475 ccw(c23.928,43.046) 24.5,42.475 ; 24.5,42.476 25.738,43.713 cw(c26.078,43.373) 26.418,43.713 cw(c26.078,43.373) 26.418,43.033 25.18,41.795 ccw(c25.751,41.224) 25.18,40.652 ccw(c25.751,41.224) 26.322,40.652 ; 26.323,40.653 27.561,41.89 cw(c27.901,41.55) 28.241,41.89 cw(c27.901,41.55) 28.241,41.21 27.003,39.972 ccw(c27.574,39.401) 27.003,38.829 ccw(c27.574,39.401) 28.145,38.829 ; 28.146,38.83 29.383,40.067 cw(c29.724,39.727) 30.064,39.388 29.182,38.505 ccw(c29.753,37.934) 29.182,37.362 ccw(c29.753,37.934) 30.324,37.362 30.4,37.438 cw(c30.74,37.097) 31.08,37.437 31.949,36.569 32.387,36.131 32.387,35.731 32.35,35.694 32.35,35.026 E1.48
Output1_2_N: E1.41 OUTPUT_1.7 | length 38.4
  Top Layer w0.2: E1.41 35.75,35.026 35.75,35.694 35.713,35.731 35.713,36.06 v3(36.054,36.4)
  Bottom Layer w0.2: OUTPUT_1.7 19.587,46.379 18.961,47.005 18.795,47.005 18.588,46.798 18.588,44.705 19.488,43.805 22.039,43.805 27.9,43.799 29.064,43.799 29.512,43.35 29.699,43.164 ccw(c29.949,43.414) 30.199,43.164 31.163,44.128 31.169,44.128 cw(c31.597,43.598) 32.079,44.08 cw(c31.597,43.598) 32.079,43.117 31.015,42.053 ; 31.014,42.053 ccw(c31.265,41.802) 31.014,41.552 ccw(c31.265,41.802) 31.515,41.552 32.197,42.234 32.202,42.234 cw(c32.631,41.705) 33.112,42.186 cw(c32.631,41.705) 33.112,41.223 32.479,40.59 ; 32.478,40.589 ccw(c32.728,40.339) 32.478,40.088 ccw(c32.728,40.339) 32.979,40.088 34.091,41.2 34.096,41.2 cw(c34.524,40.671) 35.006,41.152 cw(c34.524,40.671) 35.006,40.189 34.09,39.273 ccw(c34.34,39.023) 34.09,38.773 35.582,37.28 35.72,37.142 35.74,37.122 35.74,36.713 v3(36.054,36.4)
Output1_2_P: E1.42 OUTPUT_1.4 | length 38.7
  Top Layer w0.2: v3@35.1,36.346 v3(35.1,36.4) 35.387,36.114 35.387,35.731 35.35,35.694 35.35,35.026 E1.42
  Bottom Layer w0.2: OUTPUT_1.4 18.564,47.402 18.564,47.236 18.261,46.933 18.261,44.57 19.353,43.478 22.039,43.478 27.758,43.478 ; 27.765,43.472 28.928,43.472 29.281,43.119 29.467,42.933 ccw(c29.949,43.414) 30.431,42.932 31.346,43.848 cw(c31.597,43.598) 31.847,43.849 ; 31.847,43.849 cw(c31.597,43.598) 31.847,43.348 30.735,42.236 30.735,42.231 ccw(c31.265,41.802) 30.783,41.321 ccw(c31.265,41.802) 31.746,41.321 32.38,41.954 cw(c32.631,41.705) 32.881,41.955 cw(c32.631,41.705) 32.881,41.454 32.199,40.772 32.199,40.767 ccw(c32.728,40.339) 32.247,39.857 ccw(c32.728,40.339) 33.21,39.857 ; 33.21,39.857 34.274,40.921 ; 34.274,40.921 cw(c34.524,40.671) 34.775,40.921 cw(c34.524,40.671) 34.775,40.421 33.859,39.504 ccw(c34.34,39.023) 33.859,38.541 35.255,37.145 35.413,36.987 35.413,36.835 35.413,36.713 v3(35.1,36.4) v3@35.1,36.454
Output1_3_N: E1.34 OUTPUT_1.6 | length 40.4
  Top Layer w0.2: OUTPUT_1.6 17.934,47.266 17.934,47.432 17.673,47.693 16.539,47.693 15.821,48.411 15.821,51.967 16.539,52.685 17.96,52.685 18.805,51.84 25.56,51.84 25.752,51.648 39.022,38.378 39.214,38.186 39.214,35.731 39.25,35.694 39.25,35.026 E1.34
Output1_3_P: E1.35 OUTPUT_1.5 | length 40.5
  Top Layer w0.2: OUTPUT_1.5 19.524,47.596 18.232,47.596 17.808,48.02 16.675,48.02 16.148,48.547 16.148,51.831 16.675,52.358 17.825,52.358 18.67,51.513 19.7,51.513 20.38,51.513 cw(c20.38,51.281) 20.612,51.281 20.612,51.204 ccw(c20.844,51.204) 20.844,50.972 20.96,50.972 ccw(c20.96,51.204) 21.192,51.204 21.192,51.281 cw(c21.424,51.281) 21.424,51.513 21.54,51.513 cw(c21.54,51.281) 21.772,51.281 21.772,51.204 ccw(c22.004,51.204) 22.004,50.972 22.12,50.972 ccw(c22.12,51.204) 22.352,51.204 22.352,51.281 cw(c22.584,51.281) 22.584,51.513 23.097,51.513 25.425,51.513 38.886,38.051 38.887,35.731 38.85,35.694 38.85,35.026 E1.35
Output1_4_N: E1.28 OUTPUT_1.9 | length 38.5
  Top Layer w0.2: E1.28 42.25,35.026 42.25,35.694 42.213,35.731 42.213,36.067 v3(42.547,36.4)
  Bottom Layer w0.2: OUTPUT_1.9 18.183,42.579 18.066,42.462 18.066,42.296 25.212,35.15 26.3,35.15 26.564,35.15 ccw(c26.564,35.504) 26.918,35.504 26.918,36.491 cw(c27.599,36.491) 28.28,36.491 28.28,34.685 ccw(c28.634,34.685) 28.988,34.685 28.988,35.504 cw(c29.669,35.504) 30.35,35.504 ccw(c30.704,35.504) 30.704,35.15 34.55,35.15 36.084,35.15 38.561,37.627 41.635,37.627 42.237,37.026 42.237,36.71 v3(42.547,36.4)
Output1_4_P: E1.29 OUTPUT_1.8 | length 39.1
  Top Layer w0.2: OUTPUT_1.8 OUTPUT_1.8@17.338,43.839 ; v3@41.6,36.346 v3(41.6,36.4) 41.886,36.114 41.886,35.731 41.85,35.694 41.85,35.026 E1.29
  Bottom Layer w0.2: OUTPUT_1.8 17.931,42.955 17.931,42.789 17.739,42.597 17.739,42.161 25.077,34.823 26.3,34.823 26.564,34.823 ccw(c26.564,35.504) 27.245,35.504 27.245,36.491 cw(c27.599,36.491) 27.953,36.491 27.953,34.685 ccw(c28.634,34.685) 29.315,34.685 29.315,35.504 cw(c29.669,35.504) 30.023,35.504 ccw(c30.704,35.504) 30.704,34.823 34.55,34.823 36.22,34.823 38.697,37.3 41.5,37.3 41.91,36.89 41.91,36.71 v3(41.6,36.4) v3@41.6,36.431
Output2_1_N: E1.44 OUTPUT_2.3 | length 33.1
  Top Layer w0.2: OUTPUT_2.3 18.706,33.049 18.706,33.215 18.823,33.332 20.673,33.332 20.937,33.332 ccw(c20.937,34.14) 21.745,34.14 21.745,35.308 cw(c22.226,35.308) 22.707,35.308 22.707,33.16 ccw(c23.515,33.16) 24.323,33.16 24.323,35.308 cw(c24.804,35.308) 25.285,35.308 25.285,33.365 ccw(c26.093,33.365) 26.901,33.365 26.901,35.254 cw(c27.382,35.254) 27.863,35.254 27.863,34.14 ccw(c28.671,34.14) 28.671,33.332 31.985,33.332 33.642,33.332 34.214,33.903 34.214,34.221 34.25,34.258 34.25,34.926 E1.44
Output2_1_P: E1.45 OUTPUT_2.2 | length 32.9
  Top Layer w0.2: OUTPUT_2.2 17.093,33.382 18.411,33.382 18.688,33.659 20.673,33.659 20.937,33.659 ccw(c20.937,34.14) 21.418,34.14 21.418,35.308 cw(c22.226,35.308) 23.034,35.308 23.034,33.16 ccw(c23.515,33.16) 23.996,33.16 23.996,35.308 cw(c24.804,35.308) 25.612,35.308 25.612,33.365 ccw(c26.093,33.365) 26.574,33.365 26.574,35.254 cw(c27.382,35.254) 28.19,35.254 28.19,34.14 ccw(c28.671,34.14) 28.671,33.659 31.985,33.659 33.507,33.659 33.887,34.038 33.887,34.221 33.85,34.258 33.85,34.926 E1.45
Output2_2_N: E1.38 OUTPUT_2.7 | length 31.5
  Top Layer w0.2: v3(25.8,31.3) 25.827,31.3 26.1,31.573 26.586,31.573 27.926,31.573 cw(c27.926,31.198) 28.301,31.198 28.301,30.902 ccw(c29.003,30.902) 29.003,30.2 ccw(c29.003,30.902) 29.705,30.902 29.705,32.325 cw(c30.08,32.325) 30.08,32.7 cw(c30.08,32.325) 30.455,32.325 30.455,31.167 ccw(c31.157,31.167) 31.157,30.465 ccw(c31.157,31.167) 31.859,31.167 31.859,31.198 cw(c32.234,31.198) 32.234,31.573 34.782,31.573 34.883,31.573 37.213,33.903 37.213,34.221 37.25,34.258 37.25,34.926 E1.38
  Bottom Layer w0.2: OUTPUT_2.7 20.489,27.984 20.489,30.135 21.886,31.532 21.893,31.539 22.149,31.539 ccw(c22.149,32.297) 22.907,32.297 22.907,33.181 cw(c23.338,33.181) 23.338,33.612 cw(c23.338,33.181) 23.769,33.181 23.769,32.297 ccw(c24.527,32.297) 24.527,31.539 25.5,31.539 25.563,31.539 25.768,31.334 25.768,31.322 v3@25.754,31.307
Output2_2_P: E1.39 OUTPUT_2.4 | length 31.3
  Top Layer w0.2: v3(25.782,32.157) 25.801,32.138 25.828,32.138 26.066,31.9 26.586,31.9 27.926,31.9 cw(c27.926,31.198) 28.628,31.198 28.628,30.902 ccw(c29.003,30.902) 29.003,30.527 ccw(c29.003,30.902) 29.378,30.902 29.378,32.325 cw(c30.08,32.325) 30.08,33.027 cw(c30.08,32.325) 30.782,32.325 30.782,31.167 ccw(c31.157,31.167) 31.157,30.792 ccw(c31.157,31.167) 31.532,31.167 31.532,31.198 cw(c32.234,31.198) 32.234,31.9 34.748,31.9 34.782,31.934 36.886,34.038 36.886,34.221 36.85,34.258 36.85,34.926 E1.39
  Bottom Layer w0.2: OUTPUT_2.4 19.601,30.885 20.106,30.38 20.272,30.38 21.757,31.866 21.886,31.866 22.149,31.866 ccw(c22.149,32.297) 22.58,32.297 22.58,33.181 cw(c23.338,33.181) 23.338,33.939 cw(c23.338,33.181) 24.096,33.181 24.096,32.297 ccw(c24.527,32.297) 24.527,31.866 25.5,31.866 25.615,31.866 25.763,32.014 25.763,32.138 v3(25.782,32.157)
Output2_3_N: E1.31 OUTPUT_2.6 | length 33.1
  Top Layer w0.2: OUTPUT_2.6 18.468,28.345 18.685,28.128 23.777,28.128 25.222,29.573 32.191,29.573 32.786,30.169 34.612,30.169 ccw(c34.612,30.723) 35.166,30.723 35.166,30.735 cw(c35.393,30.735) 35.62,30.735 35.62,29.995 ccw(c36.174,29.995) 36.728,29.995 36.728,31.2 cw(c36.955,31.2) 37.182,31.2 37.182,30.723 ccw(c37.736,30.723) 37.736,30.169 39.831,30.169 40.505,30.843 40.713,31.051 40.713,34.221 40.75,34.258 40.75,34.926 E1.31
Output2_3_P: E1.32 OUTPUT_2.5 | length 33.1
  Top Layer w0.2: OUTPUT_2.5 18.703,28.738 18.703,28.572 18.82,28.455 19.9,28.455 20.876,28.455 ccw(c20.876,28.809) 21.23,28.809 21.23,28.812 cw(c21.584,28.812) 21.938,28.812 21.938,28.809 ccw(c22.292,28.809) 22.292,28.455 23.1,28.455 23.642,28.455 25.087,29.9 32.055,29.9 32.651,30.496 32.786,30.496 34.612,30.496 ccw(c34.612,30.723) 34.839,30.723 34.839,30.735 cw(c35.393,30.735) 35.947,30.735 35.947,29.995 ccw(c36.174,29.995) 36.401,29.995 36.401,31.2 cw(c36.955,31.2) 37.509,31.2 37.509,30.723 ccw(c37.736,30.723) 37.736,30.496 39.696,30.496 40.387,31.186 40.387,31.866 40.387,34.221 40.35,34.258 40.35,34.926 E1.32
Output2_4_N: E1.25 OUTPUT_2.9 | length 33.3
  Top Layer w0.2: OUTPUT_2.9 19.281,24.545 18.656,25.17 18.656,25.336 18.92,25.6 24.471,25.6 27.685,28.814 42.372,28.814 43.664,30.105 43.664,34.252 43.8,34.388 E1.25
Output2_4_P: E1.26 OUTPUT_2.8 | length 33.1
  Top Layer w0.2: OUTPUT_2.8 17.374,25.805 17.676,25.503 18.36,25.503 18.785,25.927 24.336,25.927 27.55,29.141 42.237,29.141 43.337,30.241 43.337,34.939 E1.26
RESET: C7.2 R4.2 RESET.1 U1.3 | length 45.7
  Top Layer w0.3: R4.2 53,44.05 53.25,44.3 RESET.1 RESET.1@54.05,44.3 ; C7.2 56.633,45.063 55.87,44.3 RESET.1@54.05,44.3 ; U1.3 74.83,26.995 72.135,24.3 58.7,24.3 55.448,27.552 55.448,42.902 RESET.1@54.05,44.3
RXD0: DB1.3 U1.24 | length 14.2
  Bottom Layer w0.3: DB1.3 64.46,5.1 68.1,5.1 v2(72.3,9.3)
SELECT: C9.2 E1.24 U1.16 | length 32.2
  Top Layer w0.3: E1.24 43.8,26.23 44.363,25.667 C9.2 44.363,21.237 58.4,7.2 61.5,7.2 62.1,7.8 62.1,9.765 U1.16
TXD0: DB1.2 U1.25 | length 13
  Bottom Layer w0.3: DB1.2 66.1,4.2 68.5,4.2 v2(73.6,9.3)
V_BUS: B1.1 B1.3 C1.2 C2.2 J1.A4_B9 J1.A9_B4 R3.2 | length 48
  Top Layer w0.3: J1.A9_B4 71.4,45.3 69.6,43.5 64.3,43.5 62.5,45.3 62.5,50.052 64.148,51.7 74,51.7 76.05,49.65 76.05,48.825 J1.A4_B9 ; B1.3 77.077,42.9 77.439,42.538 77.439,42.534 77.623,42.35 78.431,42.35 78.577,42.496 78.577,42.5 78.977,42.9 B1.1
  Top Layer w0.6: J1.A4_B9 76.2,47.6 78.977,44.823 B1.1@78.977,43.237 ; B1.1 B1.1@78.977,43.237 ; C2.2@82.727,43.237 B1.1@78.977,43.237
pads on no net: B1.4 E1.14 INPUT. INPUT.1 INPUT.11 INPUT.12 INPUT.13 INPUT.14 J1. J1.A8 J1.B6 J1.B7 J1.B8 OUTPUT_1. OUTPUT_1.1 OUTPUT_1.11 OUTPUT_1.12 OUTPUT_1.13 OUTPUT_1.14 OUTPUT_2. OUTPUT_2.1 OUTPUT_2.11 OUTPUT_2.12 OUTPUT_2.13 OUTPUT_2.14

## Polygon pours and split planes (outlines as drawn)
GND on Bottom Layer "GND_L02_P001" (solid, pour order 1): 0,56.1 0,0 85,0 84.9,0.1 84.9,56.1
GND on Top Layer "GND_L01_P000" (solid, pour order 0): 0,56.1 0,0 85,0 85,56.1

## Silkscreen, mask and mechanical layers (free items; w line width, h text height)
Top Overlay:
  text "IO1" at 41.792,52.1 h0.7 r90
  text "IO0" at 44.492,52.1 h0.7 r90
  text "IO8" at 39.192,52 h0.7 r90
  text "IO7" at 46.892,52 h0.7 r90
  text "IO6" at 49.392,52 h0.7 r90
  text "IO5" at 51.992,52 h0.7 r90
  text "IO4" at 54.492,52 h0.7 r90
  text "GND" at 31.492,51.7 h0.7 r90
  text "GND" at 33.992,51.7 h0.7 r90
  text "IO10" at 36.692,51.7 h0.7 r90
  text "GND" at 31.392,3.3 h0.7 r90
  text "IO19" at 33.892,3.3 h0.7 r90
  text "IO20" at 36.592,3.3 h0.7 r90
  text "IO22" at 41.492,3.3 h0.7 r90
  text "IO15" at 46.592,3.3 h0.7 r90
  text "GND" at 49.092,3.3 h0.7 r90
  text "GND" at 51.592,3.3 h0.7 r90
  text "GND" at 54.192,3.3 h0.7 r90
  text "IO21" at 38.892,3.2 h0.7 r90
  text "IO23" at 43.992,3.2 h0.7 r90